# EAGLE board r4 (EAGLE 8.4.2)
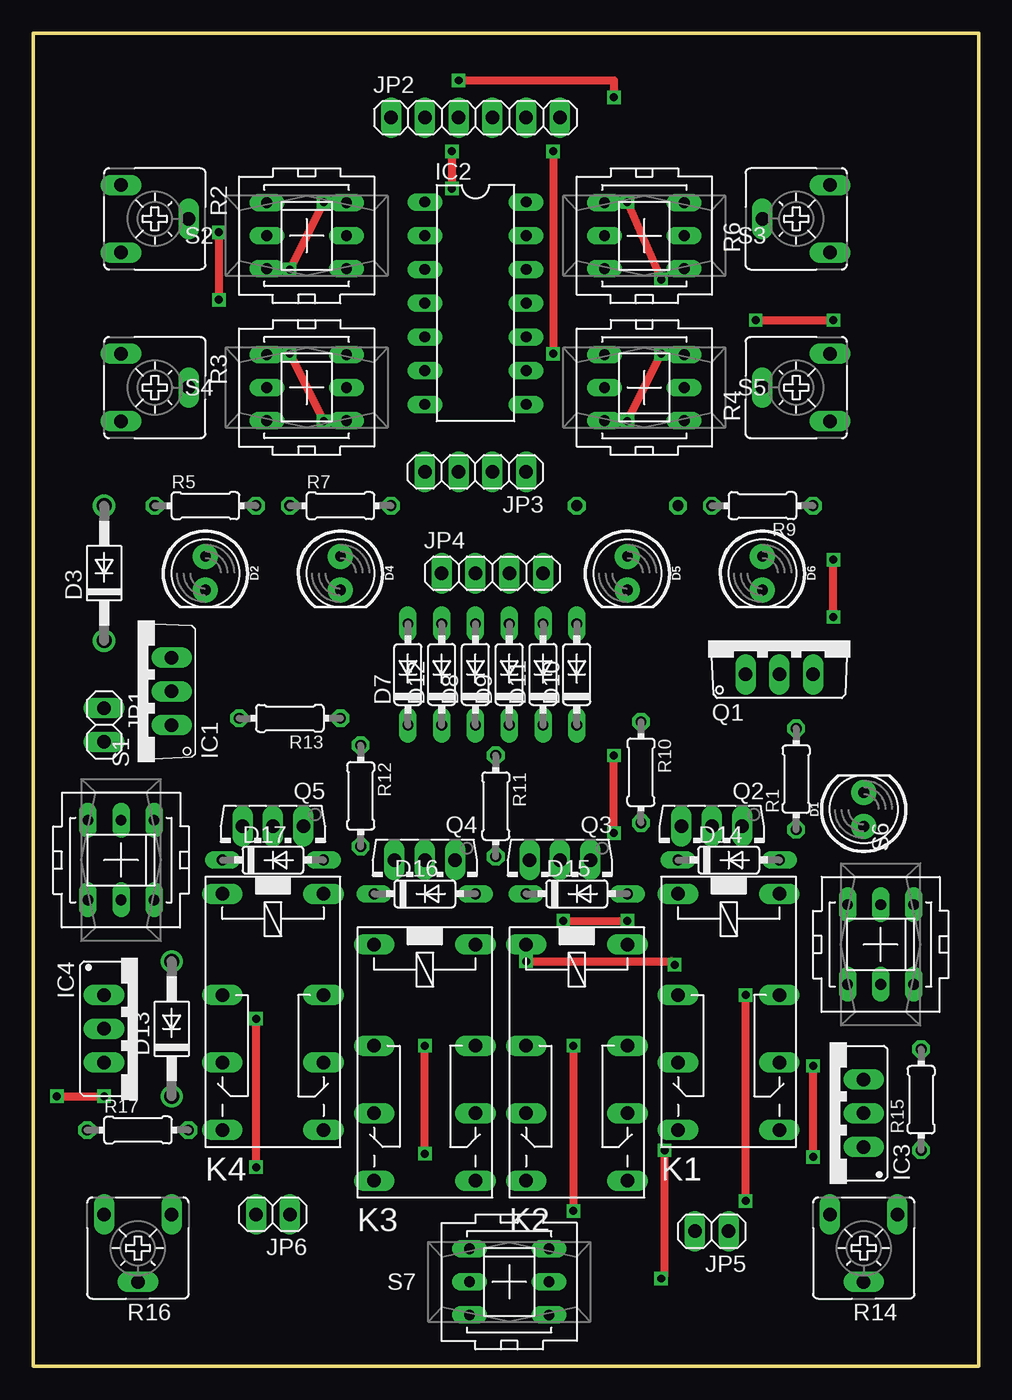
[diagram p0: board, top side]
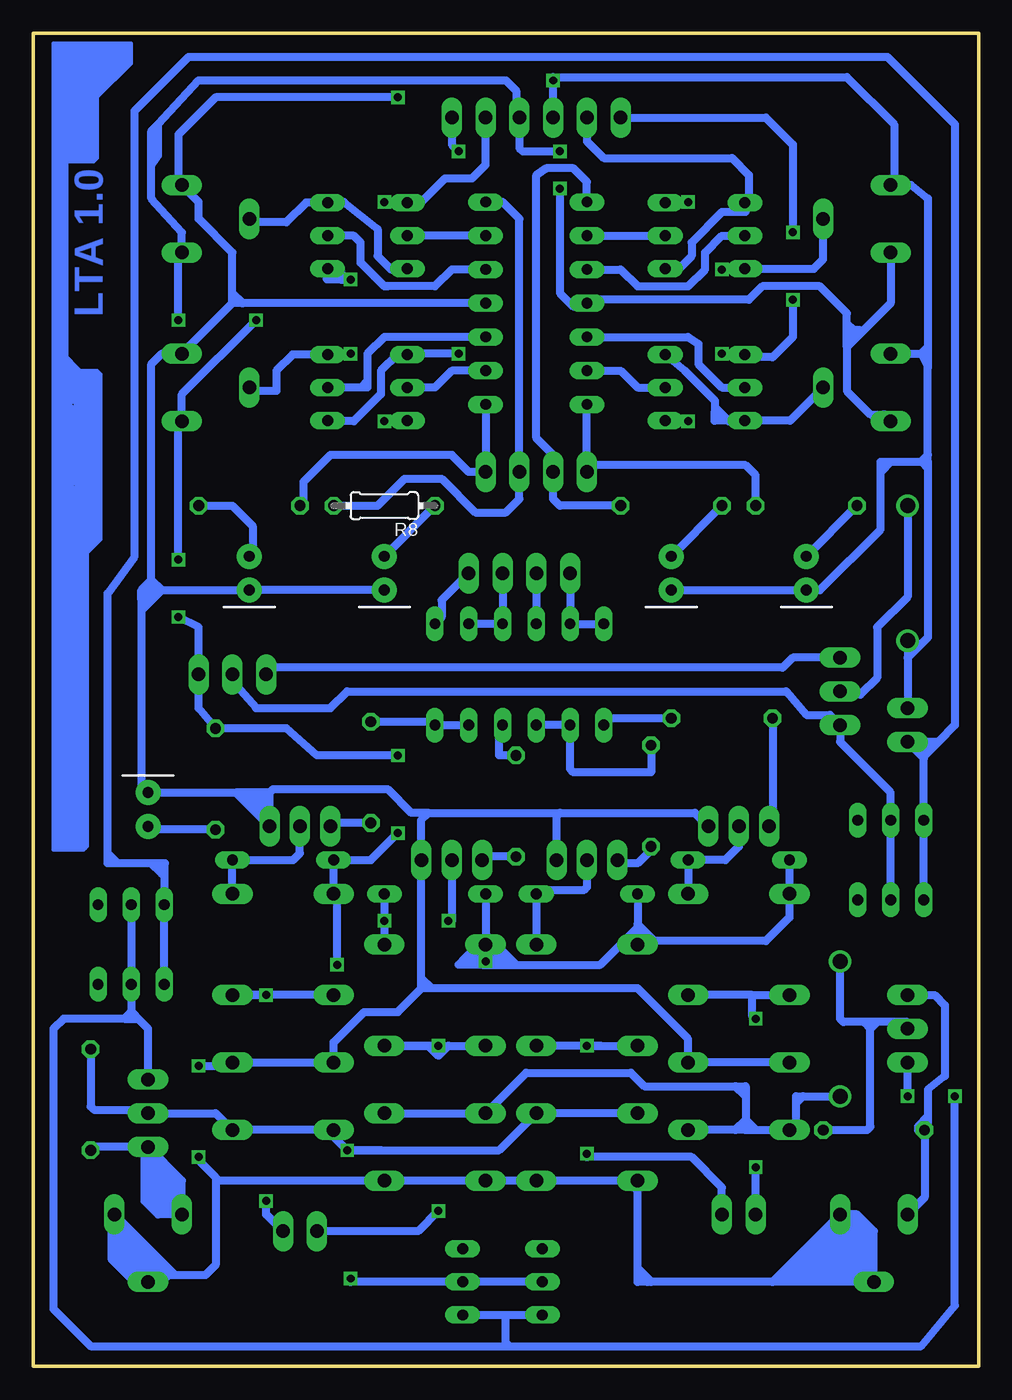
[diagram p1: board, bottom side, seen from below]

Size 71.12 x 100.33 mm. Coordinates in mm from the lower left corner, seen from the top.
Outline: 33.53,100.33 33.78,100.33 71.12,100.33 71.12,0 0,0 0,100.33 33.53,100.33
Copper layers (1*16): Top 0.035mm / dielectric 1.5mm / Bottom 0.035mm
Design rules "default": minimum track width 6mil, minimum drill 0.35mm, track to track 6mil, track to pad 6mil, pad to pad 6mil, via to via 6mil, smd to smd 6mil, copper to edge 40mil, drill to drill 6mil, minimum pad ring 10mil, minimum via ring 8mil, stop-mask expansion 4mil, vias tented up to drill 0mil, thermal gap 10mil

## Footprints (pad centres in the part's own frame; a part is rotated, then mirrored left to right if it is on the bottom)
LED_5MM = drill 0.813 pad 1.88: A -1.27,0; K 1.27,0
DO41-10 = drill 1.118: A 5.08,0; C -5.08,0
DO35-7 = drill 0.813 long: A 3.81,0; C -3.81,0
TO220V = drill 1.016 long: 1 -2.54,-2.54; 2 0,-2.54; 3 2.54,-2.54
DIL14 = drill 0.813 long: 1 -7.62,-3.81; 2 -5.08,-3.81; 3 -2.54,-3.81; 4 0,-3.81; 5 2.54,-3.81; 6 5.08,-3.81; 7 7.62,-3.81; 8 7.62,3.81; 9 5.08,3.81; 10 2.54,3.81; 11 0,3.81; 12 -2.54,3.81; 13 -5.08,3.81; 14 -7.62,3.81
317TS = drill 1.016 long: 1 -2.54,-2.54; 2 0,-2.54; 3 2.54,-2.54
1X02 = drill 1.016 long: 1 -1.27,0; 2 1.27,0
1X06 = drill 1.016 long: 1 -6.35,0; 2 -3.81,0; 3 -1.27,0; 4 1.27,0; 5 3.81,0; 6 6.35,0
1X04 = drill 1.016 long: 1 -3.81,0; 2 -1.27,0; 3 1.27,0; 4 3.81,0
351 = drill 1.016 long: 1 -3.81,-3.81; 16 -3.81,3.81; O1 8.89,-3.81; O2 8.89,3.81; P1 3.81,-3.81; P2 3.81,3.81; S1 13.97,-3.81; S2 13.97,3.81
TO220AV = drill 1.016 long: B -2.54,-2.54; C 0,-2.54; E 2.54,-2.54
TO126AV = drill 1.016 long: B 2.286,-1.27; C 0,-1.27; E -2.286,-1.27
0204/7 = drill 0.813 octagon: 1 -3.81,0; 2 3.81,0
CA6V = drill 1.016 long: A -2.54,-2.54; E 2.54,-2.54; S 0,2.54
PVA2F = drill 0.813 long: 1 -2.997,2.489; 2 -2.997,0; 3 -2.997,-2.489; 4 2.997,2.489; 5 2.997,0; 6 2.997,-2.489

## Placement (x,y rotation side)
D1  [LED_5MM]  62.48,41.91 90 top
D2  [LED_5MM]  12.95,59.69 270 top
D3  1N4004  [DO41-10]  5.33,59.69 90 top
D4  [LED_5MM]  23.11,59.69 270 top
D5  [LED_5MM]  44.7,59.69 270 top
D6  [LED_5MM]  54.86,59.69 270 top
D7  [DO35-7]  28.19,52.07 90 top
D8  [DO35-7]  33.27,52.07 90 top
D9  [DO35-7]  35.81,52.07 90 top
D10  [DO35-7]  40.89,52.07 90 top
D11  [DO35-7]  38.35,52.07 90 top
D12  [DO35-7]  30.73,52.07 90 top
D13  1N4004  [DO41-10]  10.41,25.4 90 top
D14  [DO35-7]  52.32,38.1 0 top
D15  [DO35-7]  40.89,35.56 0 top
D16  [DO35-7]  29.46,35.56 0 top
D17  [DO35-7]  18.03,38.1 0 top
IC1  7805TV  [TO220V]  7.87,50.8 90 top
IC2  LM324N  [DIL14]  33.27,80.01 270 top
IC3  [317TS]  59.94,19.05 90 top
IC4  [317TS]  7.87,25.4 270 top
JP1  [1X02]  5.33,48.26 270 top
JP2  [1X06]  33.27,93.98 0 top
JP3  [1X04]  33.27,67.31 180 top
JP4  [1X04]  34.54,59.69 0 top
JP5  [1X02]  51.05,10.16 180 top
JP6  [1X02]  18.03,11.43 180 top
K1  351  [351]  52.32,31.75 270 top
K2  351  [351]  40.89,27.94 270 top
K3  351  [351]  29.46,27.94 270 top
K4  351  [351]  18.03,31.75 270 top
Q1  TIP41C  [TO220AV]  56.13,54.61 0 top
Q2  BD139  [TO126AV]  51.05,39.37 180 top
Q3  BD139  [TO126AV]  39.62,36.83 180 top
Q4  BD139  [TO126AV]  29.46,36.83 180 top
Q5  BD139  [TO126AV]  18.03,39.37 180 top
R1  [0204/7]  57.4,44.2 90 top
R2  [CA6V]  9.14,86.36 270 top
R3  [CA6V]  9.14,73.66 270 top
R4  [CA6V]  57.4,73.66 90 top
R5  [0204/7]  12.95,64.77 0 top
R6  [CA6V]  57.4,86.36 90 top
R7  [0204/7]  23.11,64.77 0 top
R8  [0204/7]  44.7,64.77 180 bottom
R9  [0204/7]  54.86,64.77 180 top
R10  [0204/7]  45.72,44.7 270 top
R11  [0204/7]  34.8,42.16 270 top
R12  [0204/7]  24.64,42.93 270 top
R13  [0204/7]  19.3,48.77 180 top
R14  [CA6V]  62.48,8.89 180 top
R15  [0204/7]  66.8,20.07 90 top
R16  [CA6V]  7.87,8.89 180 top
R17  [0204/7]  7.87,17.78 0 top
S1  PVA2F  [PVA2F]  6.6,38.1 90 top
S2  PVA2F  [PVA2F]  20.57,85.09 180 top
S3  PVA2F  [PVA2F]  45.97,85.09 0 top
S4  PVA2F  [PVA2F]  20.57,73.66 180 top
S5  PVA2F  [PVA2F]  45.97,73.66 0 top
S6  PVA2F  [PVA2F]  63.75,31.75 90 top
S7  PVA2F  [PVA2F]  35.81,6.35 180 top

## Library data of the parts
D1 D2 D4-D6 = SparkFun-LED
D3 D7-D17 = diode
IC1 IC2 = linear
IC3 IC4 = v-reg
JP1-JP6 = pinhead
K1-K4 = relay; OC_FARNELL: unknown; OC_NEWARK: unknown
Q1-Q5 = transistor-power
R1 R5 R7-R13 R15 R17 = resistor
R2-R4 R6 R14 R16 = pot
S1-S7 = switch-misc

## Nets
DEKI: JP2.2 S2.1 S2.6
GND: D1.K D2.K D3.C D4.K D5.K D6.K IC2.11 JP1.1 JP2.3 K1.O1 K1.O2 K2.S1 K2.S2 K3.S1 K3.S2 K4.O1 K4.O2 Q2.E Q3.E Q4.E Q5.E R2.A R3.A R4.E R6.E R14.A R14.S R16.A R16.S
LEFT: D8.C D12.C R12.1
N$1: D3.A IC1.2
N$2: IC1.1 Q1.C S1.2 S1.5
N$3: IC1.3 Q1.B
N$4: D1.A R1.1
N$5: R2.S S2.3 S2.4
N$6: IC2.2 S2.2
N$7: IC2.3 S2.5
N$8: R6.S S3.3 S3.4
N$9: IC2.13 S3.2
N$10: IC2.12 S3.5
N$11: R3.S S4.3 S4.4
N$12: IC2.6 S4.2
N$13: IC2.5 S4.5
N$14: R4.S S5.3 S5.4
N$15: IC2.9 S5.2
N$16: IC2.10 S5.5
N$17: D2.A R5.1
N$18: D4.A R7.1
N$19: D5.A R8.1
N$20: D6.A R9.1
N$21: D7.A D12.A JP4.1
N$22: D8.A JP4.2
N$23: D9.A D11.A JP4.3
N$24: D10.A JP4.4
N$25: Q2.B R10.2
N$26: Q3.B R11.2
N$27: Q4.B R12.2
N$28: Q5.B R13.2
N$29: D14.A K1.16 Q2.C
N$30: IC3.1 R14.E R15.1
N$31: IC4.1 R16.E R17.1
N$32: D15.A K2.16 Q3.C
N$34: D16.A K3.16 Q4.C
N$35: JP5.1 K1.P1 K1.P2
N$36: JP5.2 K2.P1 K2.P2
N$37: D17.A K4.16 Q5.C
N$38: JP6.1 K3.P1 K3.P2
N$39: JP6.2 K4.P1 K4.P2
N$40: D13.A IC4.2 R17.2
N$41: IC3.3 IC4.3 S6.2 S6.5 S7.1 S7.4
N$48: JP2.5 S3.1 S3.6
OLEFT: IC2.1 JP3.3 R7.2
ORIGHT: IC2.14 JP3.2 R8.2
OSLEFT: IC2.7 JP3.4 R5.2
OSRIGHT: IC2.8 JP3.1 R9.2
RIGHT: D9.C R11.1
SAKA: JP2.6 S5.1 S5.6
SAKI: JP2.1 S4.1 S4.6
SLEFT: D7.C R13.1
SRIGHT: D10.C D11.C R10.1
VCC: D14.C D15.C D16.C D17.C IC2.4 JP2.4 K1.1 K2.1 K3.1 K4.1 Q1.E R1.2 R2.E R3.E R4.A R6.A
VCC/2: JP1.2 S1.1 S1.4 S6.1 S6.4
VMAJU: IC3.2 K1.S1 K1.S2 K3.O1 K3.O2 R15.2 S7.2 S7.5
VMUNDUR: D13.C K2.O1 K2.O2 K4.S1 K4.S2

## Tracks (layer width: path | path; a pad name or v marks a point on that pad's centre or on a via)
DEKI
  Bottom 0.61: S2.1 23.52,82.55 22.61,82.55 21.59,83.57 21.59,84.58 19.3,86.87 17.53,86.87 S2.6 17.27,87.88 17.27,89.66 18.54,90.93 28.19,90.93 29.46,92.2 JP2.2
GND  (via drill 0.6)
  Top 0.61: v58.67,15.75 v58.67,22.61 | v32,96.77 43.69,96.77 v43.69,95.5
  Bottom 0.61: 5.33,53.34 D3.C 5.08,54.36 4.32,54.36 | 5.33,53.34 JP1.1 | 3.81,76.71 3.81,87.88 5.08,88.9 R2.A 6.35,89.15 6.35,93.47 9.91,97.03 32,97.03 v32,96.77 JP2.3 | 3.81,76.71 4.32,76.2 | R3.A 4.32,76.2 | 4.32,76.2 3.81,75.18 | 3.81,68.07 3.81,68.58 | 3.81,68.58 3.81,75.18 | 3.81,68.07 3.81,67.56 | 3.81,67.56 3.81,54.86 4.06,54.61 4.32,54.36 | D4.K D2.K 11.94,58.42 7.37,62.99 7.37,67.31 | D5.K D6.K 61.47,58.42 | 62.99,57.66 62.99,58.42 | 62.99,57.66 62.99,56.9 | 62.99,56.9 62.99,43.69 D1.K 55.88,43.18 | 55.88,43.18 Q2.E 53.34,43.18 | 41.4,41.66 31.5,41.66 | 41.4,41.66 42.67,41.66 44.45,43.43 53.09,43.43 53.34,43.18 | 31.5,41.66 21.34,41.66 Q5.E | Q4.E 31.75,41.4 31.5,41.66 | 41.4,41.66 41.91,41.15 Q3.E 41.91,29.21 | K4.O1 K4.O2 21.84,24.64 25.65,28.45 41.15,28.45 | 26.42,13.97 K3.S1 25.65,13.21 | 26.42,13.97 K3.S2 K2.S1 K2.S2 57.15,13.97 57.4,14.22 | 62.48,8.13 R14.S 61.98,6.86 60.96,6.86 | 62.48,8.13 62.48,8.89 | 62.48,8.89 R14.A | 57.4,14.22 58.67,15.49 v58.67,15.75 | v58.67,22.61 56.39,22.61 K1.O2 K1.O1 48.51,24.38 46.23,26.67 43.69,26.67 41.91,28.45 | 57.4,14.22 57.4,7.62 58.17,6.86 60.45,6.86 | 41.91,28.45 41.91,29.21 | 41.15,28.45 41.91,28.45 | 15.49,6.35 R16.A 9.14,11.43 7.87,10.16 R16.S 15.49,6.35 | 25.65,7.37 25.65,6.35 24.89,6.35 | 25.65,7.37 25.65,13.21 | 15.49,6.35 24.64,6.35 | 24.64,6.35 24.89,6.35 | 62.1,58.04 62.23,58.67 62.23,59.18 | 62.23,59.18 62.23,75.44 61.47,76.2 R4.E 56.13,80.01 | IC2.11 55.37,80.01 | 55.37,80.01 56.13,80.01 | 56.13,80.01 56.13,80.77 | 56.13,80.77 56.13,83.82 58.67,86.36 58.67,87.63 R6.E 60.2,89.15 60.2,92.71 57.4,95.5 v43.69,95.5 | 7.37,67.31 7.37,68.07 6.6,68.07 | 6.6,68.07 4.32,68.07
  Bottom 0.61: 4.32,68.07 3.81,68.07 | 3.81,76.71 3.81,75.18 | 3.81,68.58 4.32,68.07 | 4.32,68.07 3.81,67.56 | 6.6,68.07 7.37,67.31 | 25.65,13.21 26.42,13.97 | 24.89,6.35 25.4,6.86 | 24.64,6.35 25.65,7.37 | 62.48,8.89 60.45,6.86 | 60.45,6.86 60.96,6.86 | 60.96,6.86 62.23,8.13 62.23,7.37 61.98,7.11 63.25,7.11 63.5,7.37 63.5,7.62 64.52,8.64 64.52,10.16 | 64.52,10.41 64.52,10.16 | 64.52,10.16 62.48,8.13 | 62.48,8.13 63.25,7.37 63.25,8.38 | 63.25,8.38 62.99,8.13 | 63.25,8.38 64.26,9.4 64.26,8.89 63.5,8.13 | 62.23,6.1 61.72,6.1 60.96,6.86 | 41.15,28.45 41.91,29.21 | 53.34,43.18 55.88,43.18 | 61.47,58.42 62.99,56.9 | 62.99,57.66 62.48,58.17 61.98,58.29 62.1,58.04 | 62.1,58.42 62.1,58.04 | 62.1,58.42 61.47,58.42 | 62.99,58.42 62.1,58.42 | 61.47,58.42 62.23,59.18 | 62.23,59.18 62.99,58.42 | 55.37,80.01 56.13,80.77 | 5.33,53.34 5.08,53.59 4.57,54.1 4.32,54.36
LEFT
  Bottom 0.61: R12.1 24.64,44.7 30.48,44.7 30.73,44.96 D12.C D8.C
N$1
  Bottom 0.61: D3.A 5.33,57.91 7.62,55.63 7.62,51.82 8.89,50.55 10.16,50.55 IC1.2
N$2
  Bottom 0.61: S1.2 S1.5 6.6,43.18 10.41,46.99 IC1.1 11.18,49.02 12.95,49.02 14.48,50.8 47.5,50.8 48.77,49.53 54.36,49.53 56.13,51.56 Q1.C
N$3
  Bottom 0.61: IC1.3 13.97,53.34 14.73,52.58 53.59,52.58 Q1.B
N$4
  Bottom 0.61: R1.1 62.23,40.39 D1.A
N$5  (via drill 0.6)
  Top 0.61: v21.84,87.63 v19.3,82.55
  Bottom 0.61: S2.3 21.89,87.58 v21.84,87.63 | v19.3,82.55 S2.4 12.39,82.6 11.68,83.31 R2.S
N$6
  Bottom 0.61: IC2.2 S2.2
N$7
  Bottom 0.61: IC2.3 26.92,82.55 25.65,81.28 21.84,81.28 20.57,82.55 20.57,83.82 19.3,85.09 S2.5
N$8
  Bottom 0.61: S3.3 43.03,82.55 44.2,82.55 45.21,83.57 45.21,85.6 47.75,87.63 48.72,87.58 S3.4 50.6,87.58 52.07,86.11 54.61,86.11 R6.S
N$9
  Bottom 0.61: IC2.13 S3.2
N$10
  Bottom 0.61: IC2.12 39.62,82.55 40.89,81.28 44.45,81.28 44.7,81.28 45.47,82.04 46.48,83.06 46.48,84.58 46.99,85.09 S3.5
N$11
  Bottom 0.61: 19.81,72.64 19.86,71.17 S4.4 14.17,71.17 R3.S | 19.81,72.64 22.1,74.93 S4.3 | 18.8,71.12 19.81,72.14 19.81,72.64
N$12
  Bottom 0.61: IC2.6 26.92,74.93 25.65,73.66 S4.2
N$13
  Bottom 0.61: IC2.5 21.84,77.47 21.08,76.96 21.08,75.44 19.3,73.66 S4.5
N$14  (via drill 0.6)
  Top 0.61: v44.7,71.12 v47.24,76.2
  Bottom 0.61: S5.3 44.65,71.17 v44.7,71.12 | v47.24,76.2 S5.4 51.61,76.15 52.83,74.93 52.83,73.41 54.61,73.41 R4.S
N$15
  Bottom 0.61: IC2.9 39.62,74.93 40.89,73.66 S5.2
N$16
  Bottom 0.61: IC2.10 44.7,77.47 45.97,76.2 45.97,74.17 | 45.97,74.17 45.97,73.66 46.48,73.66 | S5.5 46.99,73.66 46.48,73.66 | 45.97,74.17 46.48,73.66
N$17
  Bottom 0.61: D2.A R5.1
N$18
  Bottom 0.61: D4.A R7.1
N$19
  Bottom 0.61: D5.A R8.1
N$20
  Bottom 0.61: R9.1 56.13,64.77 54.61,63.25 54.61,61.21 D6.A
N$21
  Bottom 0.61: JP4.1 D12.A D7.A
N$22
  Bottom 0.61: JP4.2 D8.A
N$23
  Bottom 0.61: JP4.3 D9.A | D9.A 35.81,55.12 D9.A | D9.A D11.A
N$24
  Bottom 0.61: JP4.4 40.39,57.66 40.39,56.39 D10.A
N$25
  Bottom 0.61: R10.2 48.51,40.89 Q2.B
N$26
  Bottom 0.61: R11.2 37.08,38.35 Q3.B
N$27
  Bottom 0.61: R12.2 24.64,38.86 25.65,37.85 26.92,37.85 Q4.B
N$28
  Bottom 0.61: R13.2 15.49,40.89 Q5.B
N$29
  Bottom 0.61: K1.16 D14.A 51.56,38.1 51.05,38.61 Q2.C
N$30
  Bottom 0.61: IC3.1 62.74,16.26 62.74,12.45 61.72,11.43 R14.E 59.94,13.97 IC3.1 | IC3.1 66.55,16.51 R15.1 | IC3.1 62.48,12.7 61.47,11.68 60.2,11.68 60.2,13.97 60.71,13.97 62.23,15.49 62.23,13.21 61.98,12.95 61.98,12.7 61.21,11.94 60.45,11.94 60.45,13.21 60.96,13.72 61.21,13.72 61.98,14.48 61.98,13.46 60.96,12.45 60.96,12.95 60.71,13.21 61.47,13.21 61.72,13.46
N$31
  Bottom 0.61: IC4.1 3.3,27.94 2.54,27.18 2.54,21.84 3.81,20.83 3.81,18.8 | 3.81,18.8 3.81,17.78 R17.1 4.06,12.7 R16.E | 3.81,18.8 4.57,18.03 4.57,17.78
N$32  (via drill 0.6)
  Top 0.61: v39.88,33.53 v44.7,33.53
  Bottom 0.61: D15.A v44.7,33.53 | 44.7,33.02 v44.7,33.53 | 44.7,33.02 K2.16 | Q3.C 39.62,33.53 v39.88,33.53 | v44.7,33.53 44.7,33.02
N$33
  Bottom 0.61: 9.14,77.72 9.65,77.72
N$34
  Bottom 0.61: K3.16 D16.A 33.02,35.81 29.72,35.81 29.46,36.07 Q4.C
N$35  (via drill 0.6)
  Top 0.61: v53.59,12.45 v53.59,27.94
  Bottom 0.61: K1.P1 v53.59,27.94 | 54.61,27.94 v53.59,27.94 | 54.61,27.94 K1.P2 | JP5.1 53.59,11.43 v53.59,12.45 | v53.59,27.94 54.61,27.94
N$36  (via drill 0.6)
  Top 0.61: v40.64,24.13 v40.64,11.68
  Bottom 0.61: v40.64,24.13 39.88,24.13 | 39.88,24.13 K2.P1 | v40.64,24.13 K2.P2 41.4,24.13 40.64,23.37 | 40.64,23.37 40.64,23.62 | v40.64,24.13 40.64,23.88 40.64,23.62 | v40.64,11.68 42.16,10.16 JP5.2 | 40.64,23.37 40.39,23.62 | 39.88,24.13 40.39,23.62 | 40.39,23.62 40.64,23.62
N$37
  Bottom 0.61: Q5.C 18.03,39.12 19.05,38.1 D17.A K4.16
N$38  (via drill 0.6)
  Top 0.61: v29.46,16 v29.46,24.13
  Bottom 0.61: 28.45,24.13 K3.P1 | 28.45,24.13 v29.46,24.13 | v29.46,24.13 K3.P2 | JP6.1 19.3,13.46 21.59,15.75 29.46,15.75 v29.46,16 | v29.46,24.13 28.45,24.13
N$39  (via drill 0.6)
  Top 0.61: v16.76,14.99 v16.76,26.16
  Bottom 0.61: 17.02,27.94 K4.P1 | 17.02,27.94 K4.P2 | JP6.2 v16.76,14.99 | v16.76,26.16 arc90 17.02,26.42 17.02,27.94
N$40
  Bottom 0.61: 8.13,25.91 8.64,25.91 | 8.64,25.91 10.16,25.91 10.41,26.16 D13.A | R17.2 8.38,17.78 8.13,18.03 8.13,25.4 | 5.84,25.91 IC4.2 5.33,25.91 5.84,25.91 | 5.84,25.91 7.62,25.91 | 7.62,25.91 8.13,25.91 | 8.13,25.4 8.13,25.91 | 7.62,25.91 8.13,25.4 | 8.64,25.91 8.13,25.4
N$41  (via drill 0.6)
  Top 0.61: v1.78,20.32 v5.33,20.32
  Bottom 0.61: IC3.3 62.48,25.4 62.99,25.91 63.75,26.72 | 63.75,26.72 S6.2 S6.5 | 63.75,26.72 63.75,26.67 64.26,26.16 | 64.26,26.16 68.83,26.16 69.6,25.4 69.6,4.32 66.8,1.52 35.31,1.52 | 35.31,1.52 4.32,1.52 1.78,4.57 v1.78,20.32 | v5.33,20.32 IC4.3 | 35.56,3.86 S7.4 | S7.1 35.56,3.86 | 35.31,1.52 35.56,1.78 35.56,3.86 | 64.26,26.16 63.25,26.16
N$42
  Bottom 1.016: 9.4,10.67 9.14,10.67 8.13,9.65 8.13,6.86 14.22,6.86 | 14.48,6.86 14.22,6.86 | 14.22,6.86 10.16,10.92 10.16,10.41 8.89,9.14 8.89,7.62 8.64,7.37 12.7,7.37 | 12.95,7.37 12.7,7.37 | 12.7,7.37 10.41,9.65 9.4,8.64 9.4,7.87 11.18,7.87 | 11.68,7.87 11.18,7.87 | 11.18,7.87 10.41,8.64 10.16,8.64 9.65,8.13
N$43
  Bottom 1.016: 65.02,11.18 65.02,8.13 63.25,6.35 62.23,6.35
N$44
  Bottom 0.61: 25.4,32.51 25.15,32.26
N$45
  Bottom 0.61: 25.91,32.26 26.16,32
N$46
  Bottom 0.61: 53.59,42.67 53.85,42.93 54.86,42.93 53.85,41.91 | 53.85,41.91 53.85,41.66 | 53.85,41.91 53.85,42.67
N$47
  Bottom 0.61: 62.23,58.42 62.23,58.67
N$48  (via drill 0.6)
  Top 0.61: v44.7,87.63 v47.24,81.79
  Bottom 0.61: 47.75,82.04 48.26,82.55 49.02,82.55 48.51,82.04 48.26,82.04 48.01,81.79 | v44.7,87.63 44.7,87.58 S3.1 41.96,87.58 40.13,89.41 38.1,89.41 37.08,90.42 JP2.5 | v47.24,81.79 47.5,81.79 48.01,81.79 | 48.01,81.79 49.02,81.79 49.02,82.5 48.97,82.55 S3.6
N$49
  Bottom 0.254: 67.31,38.86 69.6,38.86 69.6,99.57 63.75,99.57 63.75,98.04 66.29,95.5 66.29,90.93 66.55,90.68 68.58,90.68 68.58,75.95 67.56,74.93 66.29,74.93 66.04,74.68 66.04,62.23 67.06,61.21 67.06,39.12 67.31,38.86
N$50
  Bottom 0.61: 67.56,46.48 67.56,39.62 67.31,39.37 67.31,61.47 66.29,62.48 66.29,74.42 66.55,74.68 67.56,74.68 69.09,76.2 69.09,90.93 | 69.09,90.93 68.58,91.44 67.06,91.44 66.8,91.19 66.8,95.5 64.01,98.3 64.01,99.31 69.34,99.31 69.34,39.12 67.56,39.12 | 67.31,39.12 67.56,39.12 | 67.56,39.12 68.07,39.62 68.07,46.48 67.82,46.74 | 67.82,46.74 67.56,46.99 67.56,49.02 | 67.56,49.02 67.56,61.98 67.31,62.23 | 67.06,62.48 66.8,62.74 66.8,66.04 | 66.8,66.04 66.8,74.17 67.06,74.42 67.31,74.42 | 68.33,74.42 68.83,74.42 69.09,74.68 69.09,75.44 68.83,75.44 68.07,74.68 68.58,74.68 68.83,74.93 68.83,63.5 | 68.83,61.98 68.83,57.15 | 68.83,55.63 68.83,48.01 | 68.83,48.01 68.83,45.47 | 68.83,44.45 68.83,39.37 68.58,39.37 68.33,39.62 68.33,43.94 68.83,44.45 | 68.83,44.45 68.83,45.47 | 68.83,45.47 68.33,45.97 | 68.33,45.97 68.33,44.7 | 68.33,45.97 68.33,47.24 67.82,46.74 | 67.82,46.74 67.82,47.75 68.07,48.01 | 68.07,48.01 68.07,47.5 68.33,47.5 68.83,48.01 | 68.83,48.01 68.07,48.01 | 68.07,48.01 67.82,48.26 | 67.82,48.26 68.07,48.26 68.33,48.51 68.58,48.51 68.58,52.07 68.07,52.58 68.07,49.53 | 67.56,49.02 68.07,49.53 | 68.07,49.53 68.07,48.51 67.82,48.26 | 67.82,48.26 67.82,54.61 | 67.82,55.37 67.82,56.13 68.07,56.39 | 68.07,56.39 68.83,57.15 | 68.83,57.15 68.83,55.63 | 68.83,55.63 67.82,54.61 | 67.82,54.61 67.82,55.37 | 67.82,55.37 68.58,56.13 68.58,53.59 68.07,53.09 68.07,54.36 68.33,54.61 68.33,52.83 68.58,52.58 68.58,60.45 67.82,61.21 67.82,58.17 68.07,57.91 | 68.07,57.91 68.07,56.39 | 68.07,57.91 68.07,60.2 68.33,60.45 68.33,61.47 67.82,61.98 68.83,61.98 | 68.83,61.98 68.83,63.5 | 68.83,63.5 67.06,65.28 67.06,64.52
  Bottom 0.61: 67.06,63.5 67.06,62.48 | 67.06,62.48 67.31,62.23 | 67.31,62.23 68.33,62.23 68.58,62.48 68.58,62.99 67.06,64.52 | 67.06,64.52 67.06,63.5 | 67.06,63.5 67.82,62.74 | 67.82,62.74 67.31,62.74 | 67.82,62.74 68.07,62.74 68.07,62.99 67.56,63.5 67.56,66.29 | 67.56,66.29 67.56,70.87 68.58,71.88 68.58,64.52 68.33,64.26 68.33,64.52 66.8,66.04 | 66.8,66.04 67.82,66.04 68.33,65.53 68.07,65.53 67.82,65.28 68.07,65.28 68.33,65.02 68.33,67.06 | 68.33,71.12 68.33,67.06 | 68.33,67.06 67.56,66.29 | 67.56,66.29 67.06,66.29 67.06,74.17 67.31,74.42 | 67.31,74.42 67.56,74.42 | 67.56,74.42 68.33,74.42 | 68.33,74.42 68.58,74.17 68.58,72.39 67.31,71.12 67.31,74.17 67.56,74.42 | 67.56,74.42 67.56,73.41 67.82,73.15 | 67.82,73.15 68.33,72.64 68.33,73.91 68.07,74.17 68.07,73.41 67.82,73.15 | 67.82,73.15 67.82,67.31 68.07,67.06 | 69.09,90.93 69.09,91.95 | 69.09,98.04 69.09,98.81 68.83,99.06 64.52,99.06 64.52,98.3 67.06,95.76 67.06,91.95 67.31,91.69 68.83,91.69 69.09,91.95 | 69.09,91.95 69.09,98.04 | 69.09,98.04 68.33,98.81 65.02,98.81 65.02,98.04 67.31,95.76 67.31,92.46 67.56,92.2 68.83,92.2 68.83,92.46 | 68.83,97.03 68.83,97.79 68.07,98.55 65.79,98.55 65.53,98.3 65.53,98.04 67.82,95.76 67.82,92.71 68.58,92.71 68.83,92.46 | 68.83,92.46 68.83,97.03 | 68.83,97.03 67.82,98.04 66.04,98.04 | 66.04,98.04 65.79,98.3 | 66.04,98.04 68.07,96.01 68.07,93.47 68.33,93.22 68.33,96.52 68.58,96.77 67.56,97.79 66.8,97.79 | 66.55,97.79 66.8,97.79 | 66.8,97.79 68.07,96.52
N$51
  Bottom 0.61: 68.07,91.19 68.33,91.19 68.83,90.68 68.83,76.96 68.83,76.71 68.83,76.2 | 67.06,91.19 68.07,91.19 | 68.07,91.19 68.33,90.93 66.8,90.93 66.55,91.19 66.55,95.25
OLEFT
  Bottom 0.61: IC2.1 29.46,89.15 30.48,90.17 32.51,90.17 33.27,89.66 33.27,69.85 32,68.58 JP3.3 32,65.28 31.5,64.77 R7.2
ORIGHT
  Bottom 0.61: IC2.14 35.81,87.63 34.54,86.36 JP3.2 34.54,65.28 35.56,64.26 37.85,64.26 40.39,66.8 43.18,66.8 45.21,64.77 R8.2
OSLEFT
  Bottom 0.61: IC2.7 JP3.4 28.96,67.82 17.53,67.82 16.76,67.06 R5.2
OSRIGHT
  Bottom 0.61: IC2.8 JP3.1 38.35,67.31 39.62,68.58 48.77,68.58 50.8,66.55 50.8,65.02 R9.2
RIGHT
  Bottom 0.61: R11.1 36.07,45.97 36.07,48.01 D9.C
SAKA  (via drill 0.6)
  Top 0.61: v39.12,91.44 v39.12,76.2
  Bottom 0.61: JP2.6 39.62,91.95 v39.12,91.44 | v39.12,76.2 42.93,76.2 S5.1 43.74,76.15 44.96,74.93 44.96,73.15 46.99,71.12 48.92,71.12 S5.6
SAKI  (via drill 0.6)
  Top 0.61: v13.97,85.34 v13.97,80.26 | v19.3,76.2 v21.84,71.12
  Bottom 0.61: JP2.1 16,93.98 13.97,91.95 v13.97,85.34 | v13.97,80.26 13.97,77.47 15.49,75.95 17.37,75.95 S4.6 19.25,76.15 v19.3,76.2 | v21.84,71.12 S4.1
SLEFT
  Bottom 0.61: R13.1 27.69,48.77 D7.C
SRIGHT
  Bottom 0.61: R10.1 41.15,48.51 D10.C D11.C
VCC  (via drill 0.6)
  Top 0.61: v37.08,30.48 48.01,30.48 v48.26,30.23 | v43.69,40.13 v43.69,45.97 | v60.2,56.39 v60.2,60.71 | v54.36,78.74 v60.2,78.74 | v31.5,91.44 v31.5,88.65
  Bottom 0.61: D15.C 37.08,32.26 | 37.08,32.26 K2.1 | D16.C 25.65,33.27 | 25.65,33.27 25.65,33.02 | 25.65,33.02 K3.1 | D17.C K4.1 14.22,33.78 16,32 24.38,32 | 24.38,32 25.4,32 K3.1 | K3.1 26.92,31.75 | 26.92,31.75 28.45,30.23 34.8,30.23 | 37.34,30.23 36.32,30.23 | 36.32,30.23 34.8,30.23 | 37.34,30.23 37.34,30.48 | 37.34,30.48 37.34,31.5 K2.1 | 37.34,30.23 v37.08,30.48 K2.1 | v48.26,30.23 48.26,35.31 K1.1 D14.C 45.72,38.1 v43.69,40.13 | v43.69,45.97 49.78,45.97 52.07,48.01 R1.2 58.67,49.53 Q1.E 58.67,55.63 v60.2,56.39 | R2.E 6.6,80.01 9.91,76.71 | 9.91,76.71 9.91,73.41 8.13,71.63 7.11,71.63 R3.E | 9.91,76.71 9.91,77.98 | 9.91,77.98 9.91,78.49 | 9.91,78.49 9.91,79.25 11.94,81.28 16.26,81.28 17.27,80.26 29.21,80.26 IC2.4 29.72,79.76 30.48,79.76 31.5,80.77 v31.5,88.65 | 62.23,90.42 62.23,87.88 59.94,85.34 R6.A 60.2,83.57 v60.2,78.74 | 62.23,90.42 62.23,90.93 | 62.23,90.93 62.23,91.19 | 62.23,91.19 61.72,91.19 | 61.72,91.19 61.72,91.95 | 61.72,91.95 61.72,93.47 | 61.72,93.47 58.67,96.77 35.56,96.77 34.8,96.01 34.8,94.23 JP2.4 34.54,91.69 34.29,91.44 v31.5,91.44 | v60.2,60.71 60.2,70.61 R4.A 59.94,73.15 v54.36,78.74 | 8.89,77.98 9.4,77.98 | 9.4,77.98 9.91,77.98 | 26.92,31.75 25.65,33.02 | 24.38,32 25.65,33.27 | 36.32,30.23 36.58,30.48 36.58,30.99 36.07,30.48 35.81,30.48 | 35.56,30.48 36.83,31.75 K2.1 | 34.8,30.23 36.83,32.26 37.08,32.26 | 37.08,32.26 38.86,30.48 | 38.86,30.48 37.34,30.48 | 37.34,30.48 37.85,30.99 38.1,30.73 | 37.34,30.23 39.12,30.23 38.86,30.48 | 61.72,91.19 62.23,90.42 | 62.23,90.93 61.72,91.95 | 62.23,91.19 62.23,92.96 61.72,93.47 | 9.4,77.98 9.91,78.49
VCC/2
  Bottom 0.61: S1.1 S1.4 4.11,45.77 JP1.2 3.05,46.99 | S6.1 S6.4 61.21,34.8 61.21,37.85 62.23,37.85 | 62.23,37.85 64.77,37.85 | 64.77,37.85 65.53,37.85 65.53,38.61 | 65.53,38.61 65.53,58.17 63.5,60.96 63.5,94.49 59.44,98.55 6.86,98.55 1.78,93.47 1.78,48.26 3.05,46.99 | 3.05,46.99 4.06,45.97 4.06,46.23 4.57,46.74 4.06,46.74 3.81,46.48 | 61.47,37.08 62.23,37.85 | 64.77,37.85 65.53,38.61
VMAJU  (via drill 0.6)
  Top 0.61: v47.24,6.6 47.5,6.86 v47.5,16.26
  Bottom 0.61: K3.O1 K3.O2 36.07,16.26 44.96,16.26 | R15.2 66.8,19.56 66.55,19.3 62.74,19.3 IC3.2 57.4,19.05 K1.S2 K1.S1 48.51,17.27 v47.5,16.26 | S7.5 S7.2 47.24,6.35 v47.24,6.6 | 44.96,16.26 v47.5,16.26 | v47.5,16.26 44.96,16.26
VMUNDUR
  Bottom 0.61: 17.53,17.78 18.29,17.78 | 18.29,17.78 K4.S2 | 17.53,17.78 16.76,17.78 | 16.76,17.78 K4.S1 13.72,18.29 13.72,19.81 | K2.O2 K2.O1 34.04,22.1 26.16,22.1 25.15,21.08 18.29,21.08 | 18.29,21.08 17.53,21.08 17.53,20.32 | 17.53,20.32 17.53,18.54 | 17.53,18.54 17.53,17.78 | 13.72,19.81 13.72,20.32 13.21,20.32 | 13.21,20.32 D13.C | 13.21,20.32 13.72,19.81 | 16.76,17.78 17.53,18.54 | 17.53,18.54 18.29,17.78 | 17.53,20.32 18.29,21.08

## Text on the board
Bottom: LTA 1.0